# EAGLE board ORing_v2 (EAGLE 8.2.1)
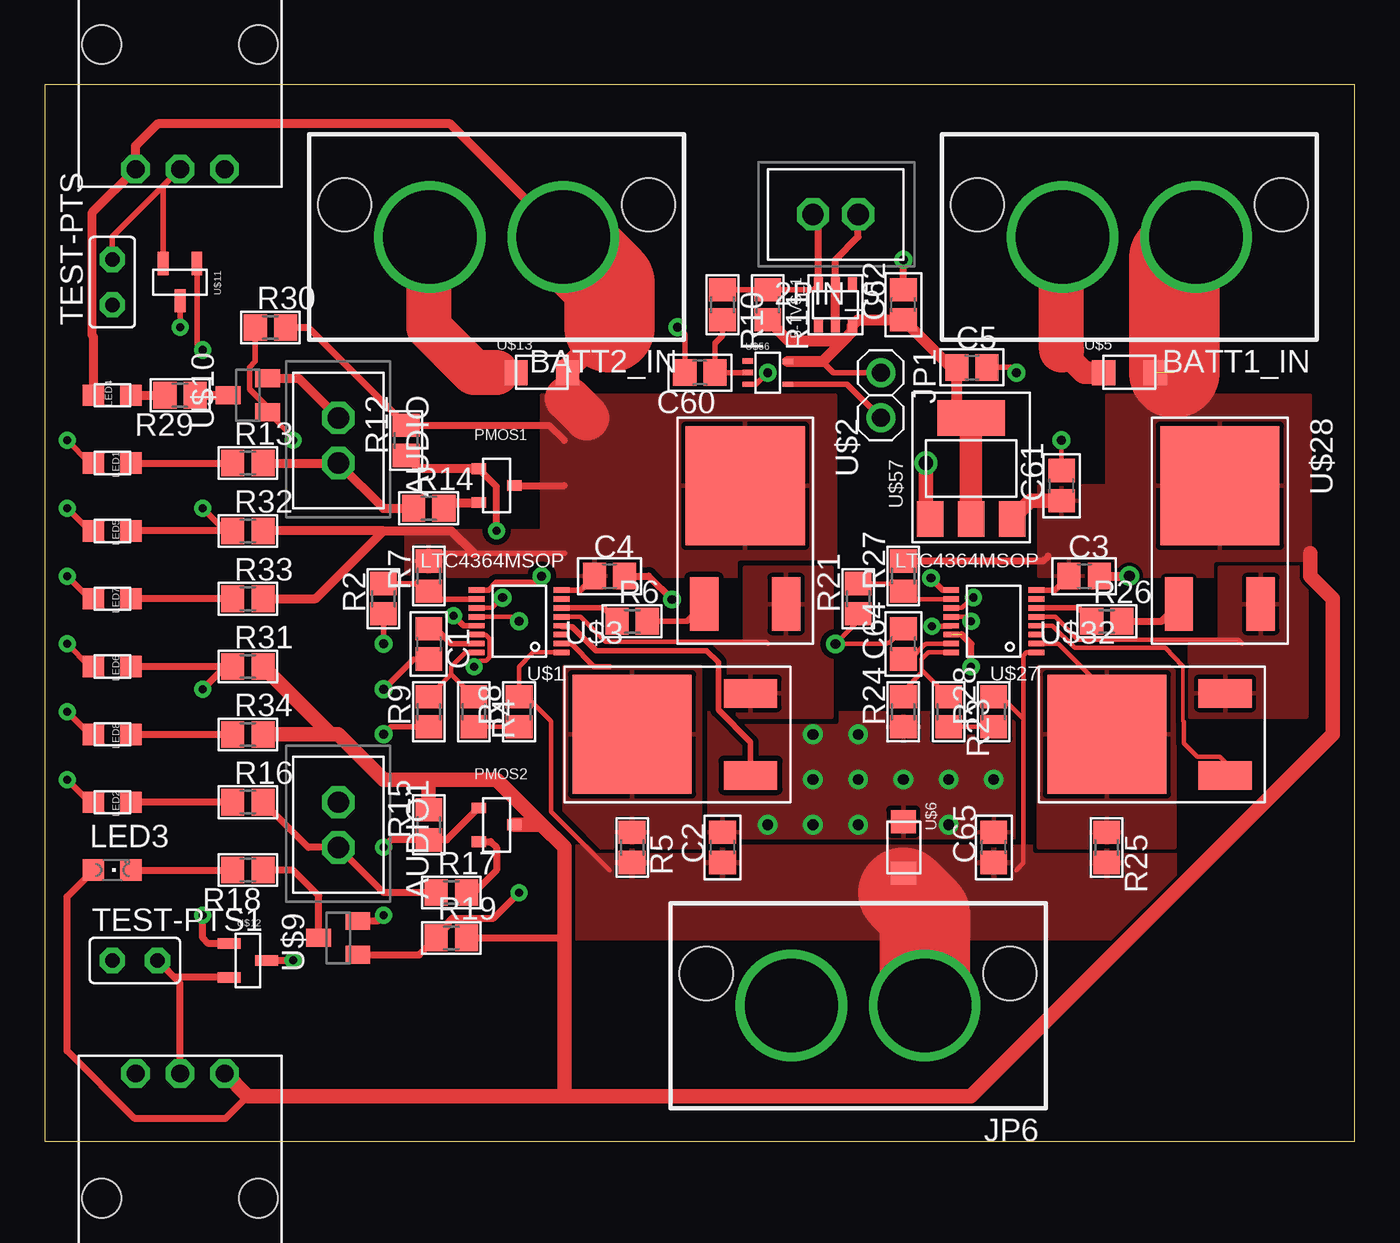
[diagram p0: board, top side]
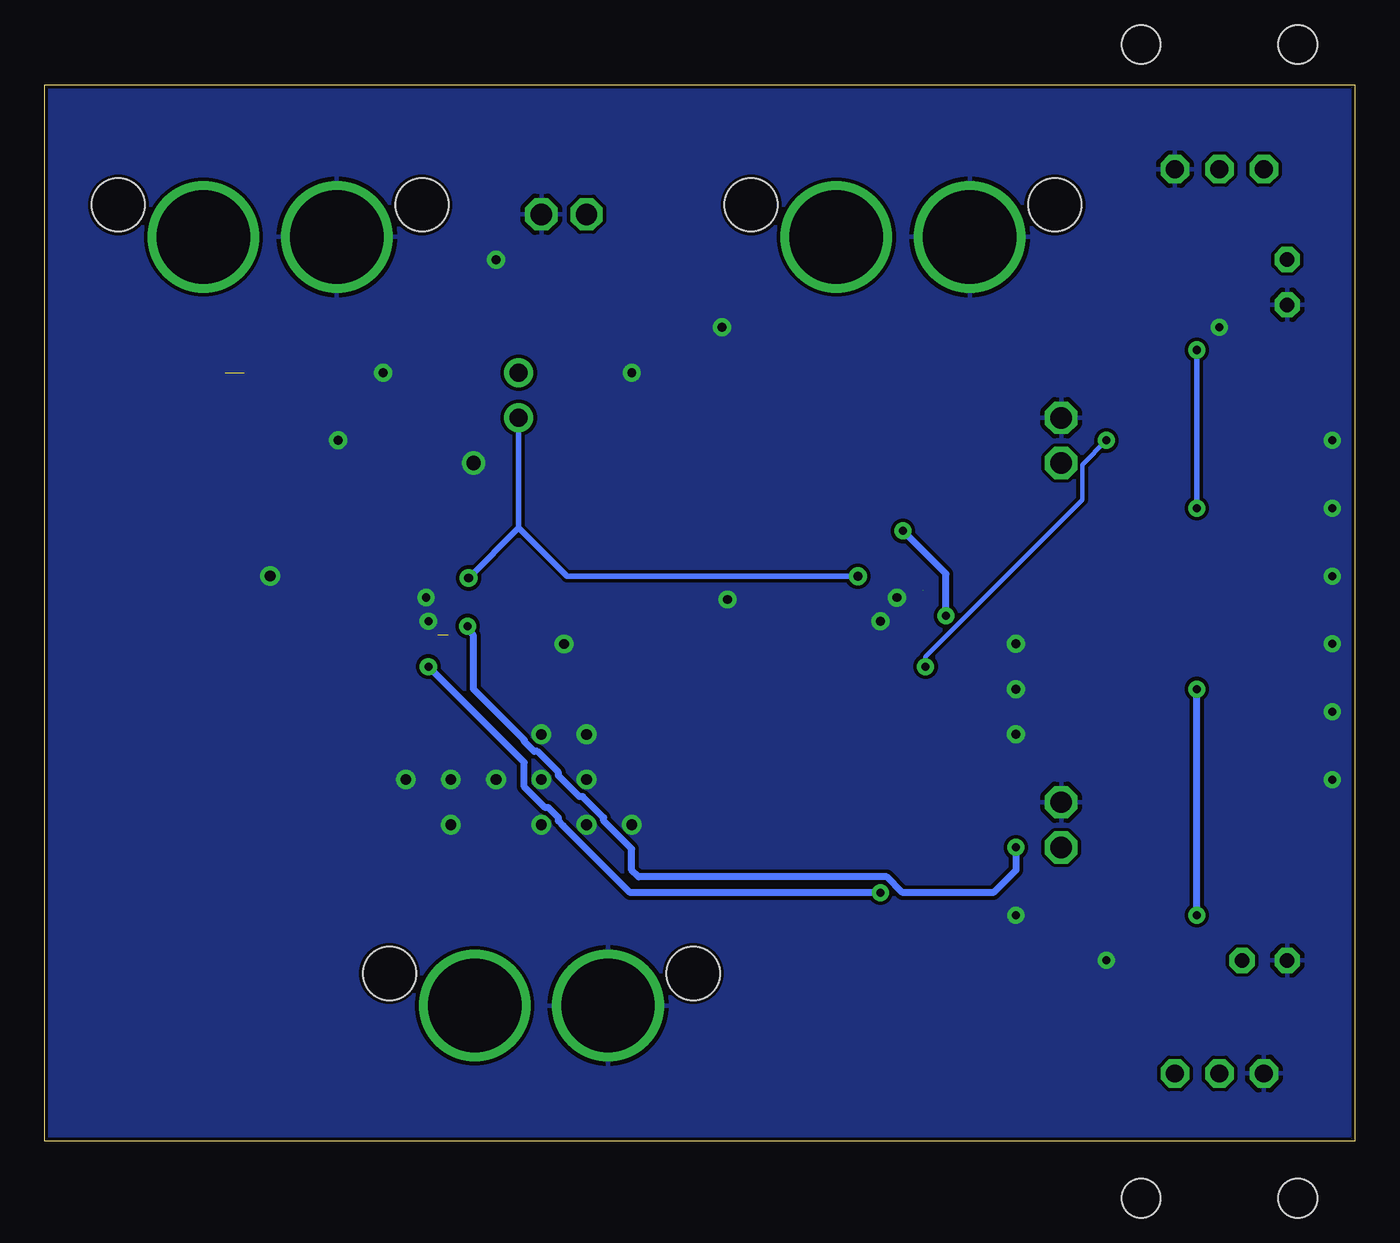
[diagram p1: board, bottom side, seen from below]

Size 73.64 x 59.36 mm. Coordinates in mm from the lower left corner, seen from the top.
Outline: 0,0 73.64,0 73.64,59.36 0,59.36 0,0
Copper layers (1*16): Top 0.035mm / dielectric 1.5mm / Bottom 0.035mm
Design rules "SparkFun *": minimum track width 8mil, minimum drill 16mil, track to track 8mil, track to pad 6mil, pad to pad 6mil, via to via 8mil, smd to smd 6mil, copper to edge 8mil, drill to drill 8mil, minimum pad ring 12mil, minimum via ring 10mil, stop-mask expansion 4mil, vias tented up to drill 25mil, thermal gap 10mil

## Footprints (pad centres in the part's own frame; a part is rotated, then mirrored left to right if it is on the bottom)
KK254_VERT_2PIN = drill 1.2 octagon: P$1 1.27,0; P$2 -1.27,0
SOT457 = smd 0.5 x 0.8: P$1 -0.95,-1.15; P$2 0,-1.15; P$3 0.95,-1.15; P$4 0.95,1.15; P$5 0,1.15; P$6 -0.95,1.15
SUPERSABRE_2CIRCUIT = drill 5.25: P$1 -3.747,0; P$2 3.747,0 | hole 2.997: -8.534,-1.803; 8.534,-1.803
C0805 = smd 1.3 x 1.5: 1 -0.85,0; 2 0.85,0
1X02 = drill 1.016: 1 -1.27,0; 2 1.27,0
0805 = smd 1.2 x 1.2: P$1 -1.05,0; P$2 1.05,0
CHIPLED_0805 = smd 1.2 x 1.2: A 0,-1.05; C 0,1.05
SOT-346-3/S-MINI = smd 0.6 x 0.8: P$1 -0.95,-1; P$2 0.95,-1; P$3 0,1
PTV09A-4 = drill 1 octagon: P$1 -2.5,0; P$2 0,0; P$3 2.5,0 | hole 2.2: -4.4,7; 4.4,7
R0805 = smd 1.3 x 1.5: 1 -0.85,0; 2 0.85,0
V526-0 = drill 0.813 octagon: 1 -1.27,0; 2 1.27,0
MSOP16 = smd 0.305 x 0.889: DGATE -0.25,-2.39; ENOUT -0.75,2.39; FB -1.75,2.39; FLT -0.25,2.39; GND 0.25,2.39; HGATE 0.75,-2.39; NC -0.75,-2.39; NC1 1.25,-2.39; OUT -1.75,-2.39; OV 0.75,2.39; SENSE -1.25,-2.39; SHDN 1.75,2.39; SOURCE 0.25,-2.39; TMR -1.25,2.39; UV 1.25,2.39; VCC 1.75,-2.39
DPAK = smd 3 x 1.6: 1 1.57,-2.3; 3 1.57,2.3 | smd 6.7 x 6.7: TAB -5.08,0
DO-219AB = smd 1.3 x 1.4: P$1 -1.45,0; P$2 1.45,0
SOT23 = smd 1 x 1.4: 1 -0.95,-1.1; 2 0.95,-1.1; 3 0,1.1
SOT-23-3 = smd 1.3 x 0.6: P$1 -1.05,0.95; P$2 -1.05,-0.95; P$3 1.05,0
TSSOP5 = smd 0.3 x 0.6: P$1 -0.65,-1.125; P$2 0,-1.125; P$3 0.65,-1.125; P$4 0.65,1.125; P$5 -0.62,1.125
SOT-223 = smd 1.5 x 2: P$1 -2.3,-3.15; P$2 0,-3.15; P$3 2.3,-3.15 | smd 3.8 x 2: P$4 0,2.54

## Placement (x,y rotation side)
2PIN_5  KK254_VERT_2PIN""  [KK254_VERT_2PIN]  44.45,52.07 180 top
5-TVS_1  BZA408B  [SOT457]  44.45,46.99 0 top
AUDIO  KK254_VERT_2PIN""  [KK254_VERT_2PIN]  16.51,39.37 270 top
AUDIO1  KK254_VERT_2PIN""  [KK254_VERT_2PIN]  16.51,17.78 270 top
BATT1_IN  2_SUPERSABRE  [SUPERSABRE_2CIRCUIT]  60.96,50.8 180 top
BATT2_IN  2_SUPERSABRE  [SUPERSABRE_2CIRCUIT]  25.4,50.8 180 top
C1  0.22u  [C0805]  21.59,27.94 270 top
C2  22u  [C0805]  38.1,16.51 90 top
C3  1u  [C0805]  58.42,31.75 0 top
C4  1u  [C0805]  31.75,31.75 0 top
C5  1u  [C0805]  52.11,43.47 0 top
C60  1u  [C0805]  36.83,43.18 180 top
C61  10u  [C0805]  57.15,36.83 90 top
C62  10u  [C0805]  48.26,46.99 90 top
C64  0.22u  [C0805]  48.26,27.94 90 top
C65  22u  [C0805]  53.34,16.51 90 top
JP1  [1X02]  46.99,41.91 270 top
JP6  2_SUPERSABRE  [SUPERSABRE_2CIRCUIT]  45.72,7.62 180 top
LED1  Red  [0805]  3.81,38.1 180 top
LED2  Red  [0805]  3.81,19.05 180 top
LED3  Green  [CHIPLED_0805]  3.81,15.24 270 top
LED4  Green  [0805]  3.81,41.91 0 top
LED5  Yellow  [0805]  3.81,34.29 180 top
LED6  Yellow  [0805]  3.81,26.67 180 top
LED7  Green  [0805]  3.81,30.48 180 top
LED8  Green  [0805]  3.81,22.86 180 top
PMOS1  SSM3J353F  [SOT-346-3/S-MINI]  25.4,36.83 270 top
PMOS2  SSM3J353F  [SOT-346-3/S-MINI]  25.4,17.78 270 top
POT  10k  [PTV09A-4]  7.62,54.61 0 top
POT1  10k  [PTV09A-4]  7.62,3.81 180 top
R2  20.8k  [R0805]  19.05,30.48 90 top
R4  51k  [R0805]  24.13,24.13 270 top
R5  5m  [R0805]  33.02,16.51 270 top
R6  10\  [R0805]  33.02,29.21 0 top
R7  200k  [R0805]  21.59,31.75 90 top
R8  8.2k  [R0805]  26.67,24.13 90 top
R9  5.1k  [R0805]  21.59,24.13 90 top
R10  510  [R0805]  38.1,46.99 270 top
R11  6.8k  [R0805]  40.64,46.99 270 top
R12  20k  [R0805]  20.32,39.37 90 top
R13  430  [R0805]  11.43,38.1 0 top
R14  330  [R0805]  21.59,35.56 0 top
R15  20k  [R0805]  21.59,17.78 90 top
R16  430  [R0805]  11.43,19.05 0 top
R17  330  [R0805]  22.86,13.97 0 top
R18  1.2k  [R0805]  11.43,15.24 180 top
R19  20k  [R0805]  22.86,11.43 0 top
R21  12k  [R0805]  45.72,30.48 90 top
R23  51k  [R0805]  50.8,24.13 270 top
R24  5.1k  [R0805]  48.26,24.13 90 top
R25  5m  [R0805]  59.69,16.51 270 top
R26  10\  [R0805]  59.69,29.21 0 top
R27  200k  [R0805]  48.26,31.75 90 top
R28  8.2k  [R0805]  53.34,24.13 90 top
R29  1.2k  [R0805]  7.62,41.91 180 top
R30  20k  [R0805]  12.7,45.72 0 top
R31  330  [R0805]  11.43,26.67 0 top
R32  330  [R0805]  11.43,34.29 0 top
R33  1.5k  [R0805]  11.43,30.48 0 top
R34  1.5k  [R0805]  11.43,22.86 0 top
TEST-PTS  0  [V526-0]  3.81,48.26 90 top
TEST-PTS1  0  [V526-0]  5.08,10.16 0 top
U$1  LTC4364MSOP  [MSOP16]  26.67,29.21 90 top
U$2  STD95N2LH5  [DPAK]  39.37,31.75 270 top
U$3  STD95N2LH5  [DPAK]  38.1,22.86 0 top
U$5  VTVS  [DO-219AB]  60.96,43.18 0 top
U$6  VTVS  [DO-219AB]  48.26,16.51 270 top
U$9  BSS138CT-NDSOT23  [SOT23]  16.51,11.43 90 top
U$10  BSS138CT-NDSOT23  [SOT23]  11.43,41.91 90 top
U$11  TL431DBZ  [SOT-23-3]  7.62,48.26 270 top
U$12  TL431DBZ  [SOT-23-3]  11.43,10.16 0 top
U$13  VTVS  [DO-219AB]  27.94,43.18 0 top
U$27  LTC4364MSOP  [MSOP16]  53.34,29.21 90 top
U$28  STD95N2LH5  [DPAK]  66.04,31.75 270 top
U$32  STD95N2LH5  [DPAK]  64.77,22.86 0 top
U$56  74LVC1G14  [TSSOP5]  40.64,43.18 270 top
U$57  NCP1117  [SOT-223]  52.07,38.1 0 top

## Library data of the parts
2PIN_5 AUDIO AUDIO1 BATT1_IN BATT2_IN JP6 = molex
5-TVS_1 = diodes
C1-C5 C60-C62 C64 C65 POT POT1 R2 R4-R19 R21 R23-R34 TEST-PTS TEST-PTS1 = resistor
JP1 = pinhead
LED1-LED8 = led
PMOS1 PMOS2 U$2 U$3 U$28 U$32 = transistors
U$1 U$27 = linear
U$5 U$6 U$13 = diode
U$9 U$10 = transistor-fet
U$11 U$12 = texas
U$56 = NXP
U$57 = ONSemi

## Nets
5V: 5-TVS_1.P$3 C5.1 C62.1 JP1.1 R11.2 U$56.P$5 U$57.P$2 U$57.P$4
GND: 2PIN_5.P$2 5-TVS_1.P$2 5-TVS_1.P$5 AUDIO1.P$2 AUDIO.P$2 BATT1_IN.P$2 BATT2_IN.P$2 C1.2 C2.2 C3.2 C4.2 C5.2 C60.2 C61.2 C62.2 C64.2 C65.2 JP6.P$2 LED1.P$2 LED2.P$2 LED5.P$2 LED6.P$2 LED7.P$2 LED8.P$2 POT1.P$3 POT.P$3 R2.1 R9.1 R21.1 R24.1 TEST-PTS1.1 TEST-PTS.1 U$1.GND U$1.OV U$5.P$1 U$6.P$1 U$9.2 U$10.2 U$11.P$3 U$12.P$3 U$13.P$1 U$27.GND U$27.OV U$56.P$3 U$57.P$1
N$1: R2.2 R7.1 U$1.UV
N$2: PMOS1.P$2 R14.2
N$3: R4.1 R9.2 U$1.FB
N$4: R6.1 U$1.HGATE
N$5: PMOS2.P$2 R17.2
N$6: C1.1 U$1.TMR
N$7: R4.2 R8.1
N$8: R6.2 U$2.1
N$9: U$1.SOURCE U$2.3 U$3.3
N$10: R5.1 U$1.SENSE U$3.TAB
N$11: U$1.DGATE U$3.1
N$14: JP1.2 U$1.SHDN U$27.SHDN U$56.P$4
N$16: LED1.P$1 R13.1
N$17: PMOS1.P$1 R12.1 U$1.FLT
N$18: AUDIO.P$1 R13.2 R14.1
N$19: LED2.P$1 R16.1
N$20: PMOS2.P$1 R15.1 U$27.FLT
N$22: AUDIO1.P$1 R16.2 R17.1
N$23: POT.P$2 TEST-PTS.2 U$11.P$2
N$24: R18.1 U$9.3
N$25: LED3.C R18.2
N$26: R29.1 U$10.3
N$27: LED4.P$2 R29.2
N$28: R30.1 U$1.ENOUT U$10.1
N$29: R19.1 U$9.1 U$27.ENOUT
N$30: LED5.P$1 R32.1 U$11.P$1
N$31: POT1.P$2 TEST-PTS1.2 U$12.P$2
N$32: LED6.P$1 R31.1 U$12.P$1
N$33: LED7.P$1 R33.1
N$34: LED8.P$1 R34.1
N$37: R26.1 U$27.HGATE
N$39: R21.2 R27.1 U$27.UV
N$49: C60.1 R10.2 U$56.P$2
N$50: R23.1 R24.2 U$27.FB
N$53: C64.1 U$27.TMR
N$54: U$27.SOURCE U$28.3 U$32.3
N$57: R23.2 R28.1
N$59: R26.2 U$28.1
N$60: R25.1 U$27.SENSE U$32.TAB
N$61: U$27.DGATE U$32.1
SHDN_SW: 2PIN_5.P$1 5-TVS_1.P$6 R10.1 R11.1
V_BATT: C2.1 C65.1 JP6.P$1 R5.2 R8.2 R25.2 R28.2 U$1.OUT U$6.P$2 U$27.OUT
V_BATT1: BATT1_IN.P$1 C3.1 C61.1 LED3.A PMOS2.P$3 POT1.P$1 R15.2 R19.2 R27.2 R31.2 R34.2 U$5.P$2 U$27.VCC U$28.TAB U$57.P$3
V_BATT2: BATT2_IN.P$1 C4.1 LED4.P$1 PMOS1.P$3 POT.P$1 R7.2 R12.2 R30.2 R32.2 R33.2 U$1.VCC U$2.TAB U$13.P$2

## Tracks (layer width: path | path; a pad name or v marks a point on that pad's centre or on a via)
5V
  Top 0.305: JP1.1 44.33,43.18 43.71,43.8
  Top 0.61: U$57.P$4 51.26,41.45 C5.1 50.93,43.47 C62.1 45.7,46.14 5-TVS_1.P$3 45.4,45.49 44.89,44.98 | 44.89,44.98 43.71,43.8 U$56.P$5 | R11.2 41.8,44.98 44.89,44.98
  Top 1.27: U$57.P$2 U$57.P$4
GND  (via drill 0.45, 0.5, 0.55, 0.6, 0.8)
  Top 0.254: C64.2 47.49,28.02 47.39,28.02 47.31,27.94 v44.45,27.94 45.72,29.21 R21.1 | U$27.GND 51.82,29.46 v52.07,29.21 | U$27.OV 51.55,29.96 v52.21,30.55 | U$1.OV 25.16,29.96 v25.74,30.55 | U$1.GND 26.42,29.46 v26.67,29.21 | C61.2 v57.15,39.37
  Top 0.305: R2.1 v19.05,27.94 | C1.2 20.74,27.09 v19.05,25.4 | R9.1 19.47,23.28 v19.05,22.86 | U$56.P$3 39.99,42.53 v40.64,43.18 | C60.2 35.98,45.3 v35.56,45.72 | C5.2 54.32,43.47 v54.61,43.18 | LED7.P$2 2.54,30.48 v1.27,31.75 | LED5.P$2 2.54,34.29 v1.27,35.56 | LED6.P$2 2.54,26.67 v1.27,27.94 | LED8.P$2 2.54,22.86 v1.27,24.13 | LED2.P$2 2.54,19.05 v1.27,20.32 | LED1.P$2 2.54,38.1 v1.27,39.37 | U$11.P$3 v7.62,45.72
  Top 0.406: 5-TVS_1.P$5 44.45,49.53 45.72,50.8 2PIN_5.P$2 | C62.2 v48.26,49.53 | C4.2 33.95,31.75 v35.27,30.44 | U$12.P$3 v13.97,10.16 | U$9.2 18.73,12.38 v19.05,12.7
  Top 0.508: C3.2 v60.96,31.75 | 5-TVS_1.P$2 5-TVS_1.P$5 | U$10.2 14.29,42.86 AUDIO.P$2
  Top 0.813: U$57.P$1 49.53,35.19 v49.53,38.1
  Top 1.27: U$5.P$1 58.42,43.18 57.15,44.45 | 57.15,50.74 BATT1_IN.P$2 | U$13.P$1 25.4,43.18
  Top 2.54: 57.15,44.45 57.15,50.74 | 25.4,43.18 24.13,43.18 21.59,45.72 21.59,50.74 BATT2_IN.P$2
  other vias: 43.18,22.86 45.72,22.86 43.18,20.32 45.72,20.32 48.26,20.32 50.8,20.32 53.34,20.32 50.8,17.78 45.72,17.78 43.18,17.78 40.64,17.78
  pour Bottom: 0,99.06 100.33,99.06 100.33,-13.97 -5.08,-13.97 -5.08,99.06
  pour Top (isolate 0.305, rank 6): 36.83,16.51 36.83,24.13 55.88,24.13 55.88,16.51
N$1
  Top 0.305: U$1.UV 22.03,30.46 R7.1 21.16,31.33 R2.2
N$2
  Top 0.508: R14.2 22.76,35.88 PMOS1.P$2
N$3
  Top 0.254: U$1.FB 23.65,27.46 22.86,26.67 22.86,26.25 | 22.86,26.25 R9.2 | 22.86,26.25 R4.1
N$4
  Top 0.305: U$1.HGATE 31.42,29.96 R6.1
N$5
  Top 0.406: PMOS2.P$2 25.08,16.83 25.4,16.51 25.4,15.24 24.13,13.97 R17.2
N$6
  Top 0.305: C1.1 22.01,28.79 22.86,27.94 22.88,27.96 U$1.TMR
N$7
  Top 0.254: R4.2 R8.1
N$8
  Top 0.305: R6.2 36.1,29.21 U$2.1
N$9
  Top 0.254: U$1.SOURCE 30.12,29.46 31.53,28.05 40.53,28.05 40.64,27.94
  pour Top (isolate 0.305): 37.68,23.84 37.68,27.94 39.37,27.94 39.37,32.23 44.23,32.23 44.23,23.84
N$10
  Top 0.305: U$1.SENSE 29.08,27.94 29.61,27.94 30.88,26.67 31.75,26.67
  pour Top (isolate 0.305, rank 2): 36.83,26.67 29.21,26.67 29.21,16.51 36.83,16.51
N$11
  Top 0.305: U$3.1 39.67,22.43 37.87,24.23 37.87,26.91 37.2,27.57 30.98,27.57 29.63,28.92 29.1,28.92 U$1.DGATE
N$14  (via drill 0.5)  (1 unrouted)
  Top 0.305: U$56.P$4 45.1,42.53 JP1.2 | v49.8,31.64 50.48,30.96 U$27.SHDN | v27.94,31.75 27.59,31.41 25.39,31.41 24.95,30.97 U$1.SHDN
  Bottom 0.305: JP1.2 46.99,34.45 | 46.99,34.45 v49.8,31.64 | 46.99,34.45 44.28,31.75 v27.94,31.75
N$16
  Top 0.406: LED1.P$1 R13.1
N$17  (via drill 0.45)
  Top 0.305: U$1.FLT 23.54,28.96 v22.98,29.52
  Top 0.406: v25.4,34.29 25.4,36.78 PMOS1.P$1
  Top 0.508: PMOS1.P$1 21.06,37.78 R12.1
  Bottom 0.406: v22.98,29.52 22.98,31.88 v25.4,34.29
N$18
  Top 0.508: R13.2 AUDIO.P$1 19.05,35.56 R14.1
N$19
  Top 0.406: R16.1 LED2.P$1
N$20  (via drill 0.45)
  Top 0.305: v49.87,28.94 50.93,28.94 U$27.FLT
  Top 0.406: PMOS2.P$1 22.6,16.93 R15.1 19.47,16.93 v19.05,16.51
  Bottom 0.406: v19.05,16.51 19.05,15.24 20.32,13.97 25.42,13.97 26.3,14.86 40.26,14.86 40.64,15.24 40.64,16.42 42.22,18 42.22,18.18 43.4,19.36 43.58,19.36 44.76,20.54 44.76,20.72 45.94,21.9 46.12,21.9 46.68,22.46 46.68,22.55 49.53,25.4 49.53,28.41 v49.87,28.94
N$22
  Top 0.406: R17.1 19.05,13.97 AUDIO1.P$1 14.82,16.51 R16.2
N$23
  Top 0.305: TEST-PTS.2 3.81,50.8 6.99,53.98 | 6.99,53.98 POT.P$2 | U$11.P$2 6.67,53.66 6.99,53.98
N$24
  Top 0.406: U$9.3 15.41,13.8 13.97,15.24 R18.1
N$25
  Top 0.406: LED3.C R18.2
N$26
  Top 0.508: R29.1 U$10.3
N$27
  Top 0.508: LED4.P$2 R29.2
N$28  (via drill 0.45)
  Top 0.254: U$1.ENOUT 24.3,28.44 24.79,28.44 25,28.23 25,27.19 24.82,27 24.46,27 v24.13,26.67 | v13.97,39.37 13.97,39.52 U$10.1
  Top 0.305: U$10.1 12.53,41.23 11.53,42.23 11.53,43.49 11.85,43.81 R30.1
  Bottom 0.254: v13.97,39.37 15.33,38.01 15.33,36.03 24.13,27.23 v24.13,26.67
N$29  (via drill 0.45)  (1 unrouted)
  Top 0.406: U$9.1 21.06,10.48 R19.1 22.7,12.12 22.7,12.33 22.91,12.54 25.24,12.54 v26.67,13.97 | v52.07,26.67 52.07,27.94 51.55,28.46
  Bottom 0.406: v52.07,26.67 46.68,21.28 46.68,19.92 45.5,18.74 45.32,18.74 44.76,18.18 44.76,18 | v26.67,13.97 40.73,13.97 44.49,17.74 | 44.49,17.74 44.76,18 | 44.49,17.74 44.76,18
N$30  (via drill 0.45)
  Top 0.305: 10.16,34.71 R32.1 | U$11.P$1 8.57,44.77 v8.89,44.45 | v8.89,35.56 10.16,34.29
  Top 0.406: R32.1 10.16,34.29 LED5.P$1
  Bottom 0.305: v8.89,44.45 v8.89,35.56
N$31
  Top 0.406: U$12.P$2 7.3,9.21 TEST-PTS1.2 7.62,8.89 POT1.P$2
N$32  (via drill 0.45)
  Top 0.406: 10.16,26.67 R31.1 | 10.16,26.67 LED6.P$1 | U$12.P$1 9.21,11.11 8.89,11.43 v8.89,12.7 | v8.89,25.4 10.16,26.67
  Bottom 0.406: v8.89,12.7 v8.89,25.4
N$33
  Top 0.406: R33.1 LED7.P$1
N$34
  Top 0.406: LED8.P$1 R34.1
N$37
  Top 0.305: U$27.HGATE 58.09,29.96 R26.1
N$39
  Top 0.254: R21.2 47.83,31.33 R27.1 48.7,30.46 U$27.UV
N$49
  Top 0.305: R10.2 38.1,45.26 37.68,44.83 C60.1 U$56.P$2
N$50
  Top 0.254: 49.29,26.49 49.29,26.32 48.26,25.3 R24.2 | U$27.FB 49.67,27.46 49.29,27.07 49.29,26.67 49.29,26.49 | 49.29,26.49 R23.1
N$53
  Top 0.254: C64.1 48.66,27.09 49.48,27.92 49.51,27.92 49.55,27.96 U$27.TMR
N$54
  Top 0.254: 67.31,27.94 67.07,28.18 58.07,28.18 57.91,28.34 56.79,29.46 56.64,29.46 U$27.SOURCE
  pour Top: 64.35,23.84 64.35,27.94 66.04,27.94 66.04,32.23 70.9,32.23 70.9,23.84
N$57
  Top 0.254: R28.1 R23.2
N$59
  Top 0.406: R26.2 62.77,29.21 U$28.1
N$60
  Top 0.254: U$27.SENSE 56.97,27.96 60.8,24.13 60.8,23.97 U$32.TAB
  pour Top (isolate 0.305, rank 2): 63.5,26.67 55.88,26.67 55.88,16.51 63.5,16.51
N$61
  Top 0.203: 64.01,23.57 63.98,23.59 63.98,26.68
  Top 0.254: U$27.DGATE 56.65,28.96 57.88,27.72 62.98,27.72 63.98,26.68 | U$32.1 66.34,21.29 66.04,21.59 64.77,21.59 64.01,22.35 64.01,23.57
SHDN_SW
  Top 0.305: 5-TVS_1.P$6 43.2,47.84 R11.1 R10.1
  Top 0.406: 2PIN_5.P$1 43.5,51.75 5-TVS_1.P$6
V_BATT
  Top 0.254: R28.2 53.76,24.98 55,23.74 | U$27.OUT 55.18,27.46 55,27.29 55,23.74 | U$1.OUT 27.46,27.46 26.67,26.67 R8.2 27.09,24.98 28.47,23.6 28.47,19.05 | 54.61,15.24 55,15.63 55,23.74 | 28.47,19.05 28.47,18.99 | 28.47,19.05 28.47,18.52 31.75,15.24
  Top 5.08: JP6.P$1 49.47,12.76 48.26,13.97
  pour Top (rank 3): 63.5,16.51 29.21,16.51 29.21,11.43 63.5,11.43
V_BATT1  (1 unrouted)
  Top 0.305: U$27.VCC 56.78,30.96 C3.1
  Top 0.406: 56.4,32.88 56.12,32.6 R27.2 | 11.43,2.54 10.16,1.27 5.08,1.27 1.27,5.08 1.27,13.75 LED3.A | R19.2 29.21,11.43
  Top 0.813: U$57.P$3 55.4,35.98 C61.1 | 29.21,2.54 11.43,2.54 10.16,3.81 POT1.P$1 | 29.21,2.54 52.07,2.54 72.39,22.86 72.39,30.48 71.12,31.75 71.12,33.02 | 29.21,2.54 29.21,11.43 29.21,16.51 27.94,17.78 | 27.94,17.78 25.4,20.32 21.59,20.32 | 21.59,20.32 19.05,20.32 16.51,22.86 16.09,22.86 | 16.09,22.86 R31.2 | R34.2 16.09,22.86 | PMOS2.P$3 27.94,17.78 | R15.2 21.59,20.32
  Top 1.27: 63.5,43.18 63.5,41.91
  Top 5.08: BATT1_IN.P$1 63.5,49.59 63.5,43.18
  pour Top (rank 2): 55.88,36.83 59.69,36.83 59.69,41.91 71.12,41.91 71.12,31.75 55.88,31.75
V_BATT2
  Top 0.305: U$1.VCC 30.11,30.96 C4.1 | R7.2 22.01,33.02 24.13,33.02 29.21,33.02
  Top 0.406: PMOS1.P$3 29.21,36.83 | R30.2 14.82,45.72 R12.2 28.36,40.22 29.21,39.37
  Top 0.508: BATT2_IN.P$1 22.8,57.15 6.35,57.15 5.12,55.92 POT.P$1 2.69,52.18 2.69,45.26 2.76,45.19 LED4.P$1 | 19.05,34.29 R32.2 | 19.05,34.29 22.86,34.29 24.13,33.02 | R33.2 15.24,30.48 19.05,34.29
  Top 1.27: 31.75,45.72 29.39,43.36 U$13.P$2 29.39,41.73
  Top 2.54: 29.39,41.73 30.48,40.64
  Top 5.08: BATT2_IN.P$1 31.75,48.2 31.75,45.72
  pour Top (isolate 0.305, rank 2): 44.45,41.91 44.45,31.75 20.32,31.75 20.32,34.29 27.94,34.29 27.94,41.91